# Altium PCB F103C8T6.PcbDoc
Units mil, origin at the board's own origin, x right, y up, seen from the top; angles counter-clockwise.
Board outline 2300 x 1000 mil, 2 copper layers (Top Layer, Bottom Layer); 40 components, 49 nets, 177 pads, 68 vias.
Unrouted connection lines stored in the file: 127.
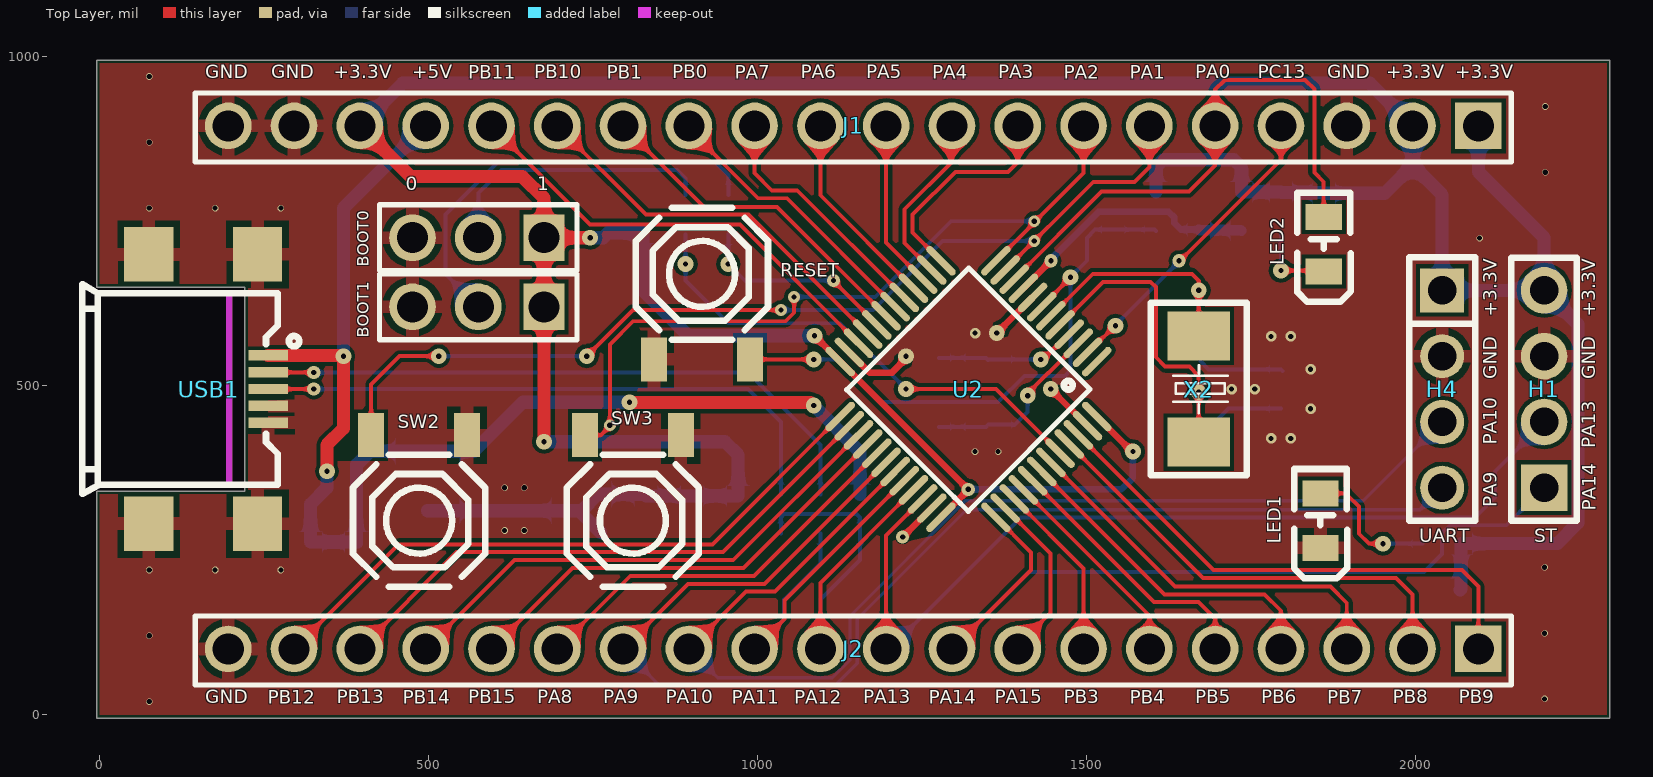
[diagram p0: Top Layer view]
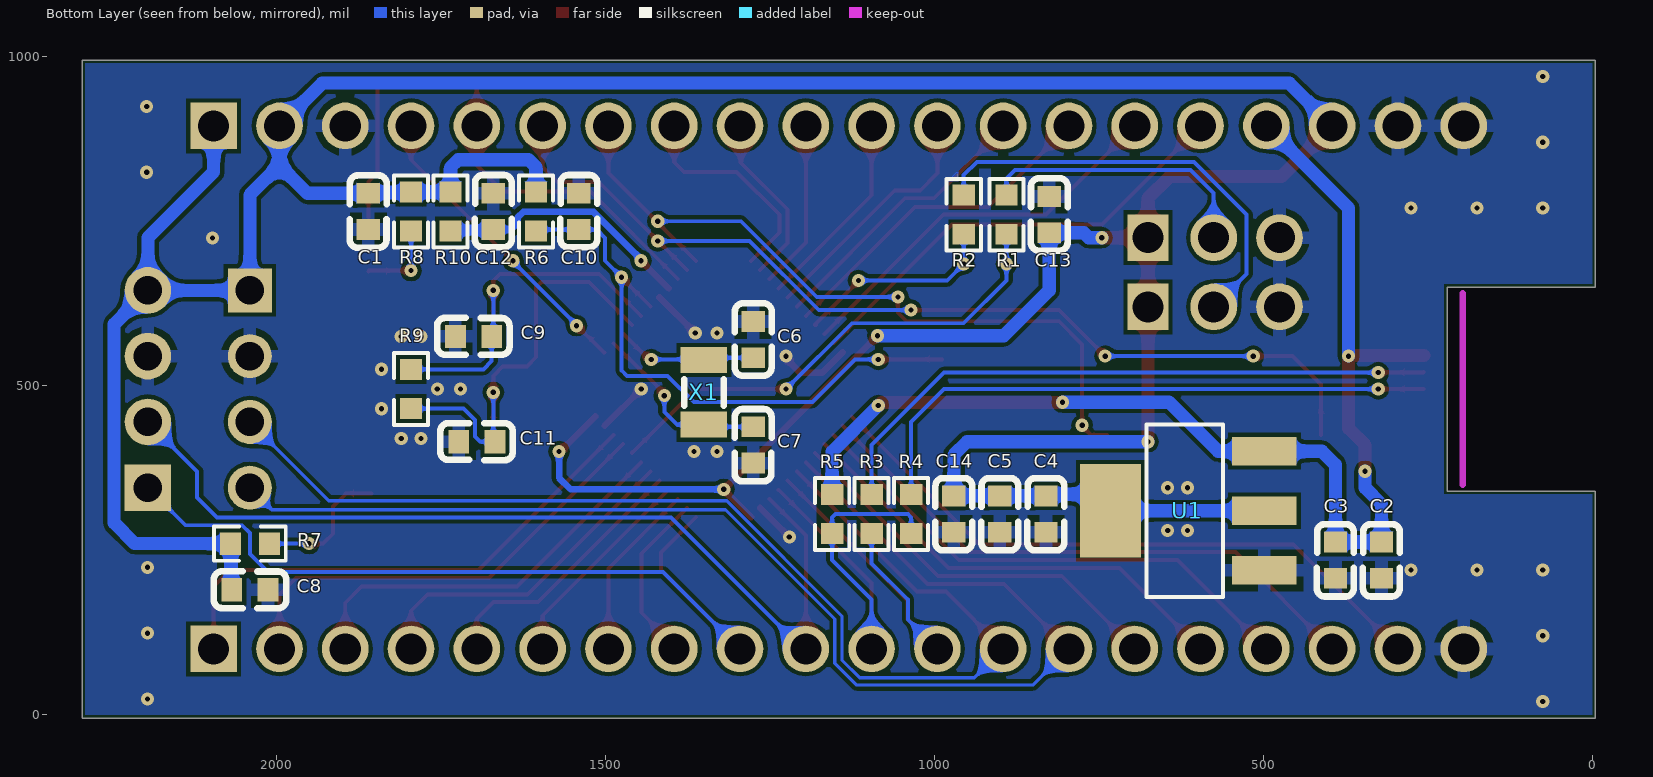
[diagram p1: Bottom Layer view, seen from below]

## Layer stack, top to bottom
Top Solder: solder mask 0.4, Solder Resist, Dk 3.5
Top Layer: signal copper 1.4
Dielectric 1: dielectric 12.6, FR-4, Dk 4.8
Bottom Layer: signal copper 1.4
Bottom Solder: solder mask 0.4, Solder Resist, Dk 3.5

## Board outline
-5,-5 -5,340 220,340 220,650 -5,650 -5,995 2295,995 2295,-5

## Design rules (kind name [scope] priority, off if disabled: settings)
Clearance [All] p1: gap=6 ignorepadtopadclearanceinfootprint=FALSE except(5: Arc-Via Track-Via SMDPad-Via THPad-Via Via-Via)
DiffPairsRouting [All] p1: maxlimit=10 minlimit=6 mostfreqgap=10 toplayer_minwidth=6 toplayer_maxwidth=15 toplayer_prefwidth=6 bottomlayer_minwidth=6 bottomlayer_maxwidth=15 bottomlayer_prefwidth=6 maxuncoupledlength=500
PlaneClearance [All] p1: clearance=8
PolygonConnect [All] p1: thpad.connectstyle=Relief thpad.reliefconductorwidth=20 thpad.reliefentries=4 thpad.polygonreliefangle="90 Angle" thpad.airgapwidth=10 smdpad.connectstyle=Relief smdpad.reliefconductorwidth=20 smdpad.reliefentries=4 smdpad.polygonreliefangle="90 Angle" smdpad.airgapwidth=10 via.connectstyle=Direct via.reliefconductorwidth=20 via.reliefentries=4 via.polygonreliefangle="90 Angle" via.airgapwidth=10
RoutingVias [All] p1: holewidth=8 width=50 viastyle="Through Hole" minholewidth=8 minwidth=24 maxholewidth=28 maxwidth=24
SilkToSilkClearance [All] p1: silktosilkclearance=2
SolderMaskExpansion [All] p1: expansion=4 istentingtop=FALSE
Width [All] p1: maxlimit=40 minlimit=5 preferedwidth=6 minimp=50.000000 maximp=50.000000 favimp=50.000000
27 further rules are at their usual default settings.

## Classes and differential pairs
component class F103C8T6: BOOT0 C1 C2 C3 C4 C5 C6 C7 C8 C9 C10 C11 C12 C13 H1 H4 J1 J2 LED1 LED2 R1 R2 R3 R4 R5 R6 R7 R8 R9 R10 RESET SW2 SW3 U1 X1 X2
differential pair NewDifferentialPair1: +NetR4_1 -NetR3_1

## Components (designator, comment, footprint, x,y, rotation, side; value= is the part's Value field where it differs from the comment)
BOOT0 "2.54-1*3P针" HDR-TH_3P-P2.54-V-M-1 575,725 r180 top (schematic designator H2)
BOOT1 "2.54-1*3P针" HDR-TH_3P-P2.54-V-M-1 575,620 r180 top (schematic designator H3)
C1 "CAP_100nf" C0603 1860,765 r90 bottom value=100nF
C2 "CAP_10uf" C0603 320,235 r90 bottom value=10uF
C3 "CAP_100nf" C0603 390,235 r90 bottom value=100nF
C4 "CAP_100nf" C0603 830,305 r90 bottom value=100nF
C5 "CAP_10uf" C0603 900,305 r90 bottom value=10uF
C6 "CAP_12pf_0603" C0603 1275,570 r270 bottom value=12pF
C7 "CAP_12pf_0603" C0603 1275,410 r90 bottom value=12pF
C8 "CAP_100nf" C0603 2040,190 r0 bottom value=100nF
C9 "CAP_20pf_0603" C0603 1700,575 r180 bottom value=20pF
C10 "CAP_100nf" C0603 1540,765 r270 bottom value=100nF
C11 "CAP_20pf_0603" C0603 1695,415 r180 bottom value=20pF
C12 "CAP_100nf" C0603 1670,765 r270 bottom value=100nF
C13 "CAP_100nf" C0603 825,760 r270 bottom value=100nF
C14 "CAP_100nf" C0603 970,305 r90 bottom value=100nF
H1 "2.54-1*4P反弯排针" HDR-TH_4P-P2.54-H-M-W10.4 2195,495 r90 top
H4 "PZ254V-11-04P" HDR-TH_4P-P2.54-V-M 2040,495 r270 top
J1 "2.54-1*20P直针" HDR-TH_20P-P2.54-V-M-1 1145,895 r180 top
J2 "2.54-1*20P直针" HDR-TH_20P-P2.54-V-M-1 1145,100 r180 top
LED1 "NCD0805G1" LED0805-Greed 1855,295 r90 top
LED2 "NCD0805R1" LED0805-Red 1860,715 r90 top
R1 "RES_10k_0603" R0603 890,760 r270 bottom value=10kΩ
R2 "RES_10k_0603" R0603 955,760 r270 bottom value=10kΩ
R3 "RES_20Ω_0603" R0603 1095,305 r270 bottom value=20Ω
R4 "RES_20Ω_0603" R0603 1035,305 r270 bottom value=20Ω
R5 "RES_4.7K_0603" R0603 1155,305 r270 bottom value=4.7kΩ
R6 "RES_10k_0603" R0603 1605,765 r90 bottom value=10kΩ
R7 "RES_1K_0603" R0603 2040,260 r0 bottom value=1kΩ
R8 "RES_1K_0603" R0603 1795,765 r90 bottom value=1kΩ
R9 "RES_1M_0603" R0603 1795,495 r90 bottom value=1MΩ
R10 "RES_0Ω_0603" R0603 1735,765 r270 bottom value=0Ω
RESET "TS-1187A-B-A-B" SW-SMD_4P-L5.1-W5.1-P3.70-LS6.5-TL-2 915,670 r270 top (schematic designator SW1)
SW2 "TS-1187A-B-A-B" SW-SMD_4P-L5.1-W5.1-P3.70-LS6.5-TL-2 485,295 r90 top
SW3 "TS-1187A-B-A-B" SW-SMD_4P-L5.1-W5.1-P3.70-LS6.5-TL-2 810,295 r90 top
U1 "AMS1117-3.3_C6186" SOT-223-3_L6.5-W3.4-P2.30-LS7.0-BR 615,310 r180 bottom
U2 "STM32F103C8T6" LQFP-48_L7.0-W7.0-P0.50-LS9.0-BL 1320,495 r135 top
USB1 "920-F52A2021S10101" MICRO-USB-SMD_5P_C40957 165,495 r270 top
X1 "Q13FC1350000400" FC-135R_L3.2-W1.5 1350,490 r90 bottom value=32.768kHz
X2 "X50328MSB2GI" CRYSTAL-SMD_L5.0-W3.2 1670,495 r90 top value=8MHz

## Footprints (in the part's own frame and the unit in brackets; to place one, negate y for a bottom-side part, rotate by r counter-clockwise, add the part's x,y. Pads: shape width x height; smd on the part's side, far side on the other; paste and mask are expansions set on the pad)
C0603 [mm]
  rect 0.8x0.9 smd mask+0.051: 1(-0.7,0) 2(0.7,0)
  silkscreen extent -1.41,-0.71 1.39,0.72
CRYSTAL-SMD_L5.0-W3.2 [mil]
  rect 74.8x94.5 smd mask+2: 1(-80.7,0) 2(80.7,0)
  silkscreen extent -131,-73 131,73
FC-135R_L3.2-W1.5 [mil]
  rect 39.4x70.9 smd mask+2: 1(-49.2,0) 2(49.2,0)
  silkscreen extent -20,-30 20,30
HDR-TH_3P-P2.54-V-M-1 [mil]
  rect 62x70.9 hole 47.2 mask+2: 1(-100,0)
  round 70.9 hole 47.2 mask+2: 2(0,0) 3(100,0)
  silkscreen extent -150,-50 150,50
HDR-TH_4P-P2.54-H-M-W10.4 [mm]
  rect 1.8x1.8 hole 1.1 mask+0.051: 1(-3.81,0)
  round 1.8 hole 1.1 mask+0.051: 2(-1.27,0) 3(1.27,0) 4(3.81,0)
  silkscreen extent -5.09,-1.26 5.07,1.27
HDR-TH_4P-P2.54-V-M [mm]
  rect 1.7x1.7 hole 1.1 mask+0.051: 1(-3.81,0)
  round 1.7 hole 1.1 mask+0.051: 2(-1.27,0) 3(1.27,0) 4(3.81,0)
  silkscreen extent -5.08,-1.27 5.08,1.27
HDR-TH_20P-P2.54-V-M-1 [mil]
  rect 70.9x70.9 hole 47.2 mask+2: 1(-950,0)
  round 70.9 hole 47.2 mask+2: 2(-850,0) 3(-750,0) 4(-650,0) 5(-550,0) 6(-450,0) 7(-350,0) 8(-250,0) 9(-150,0) 10(-50,0) 11(50,0) 12(150,0) 13(250,0) 14(350,0) 15(450,0) 16(550,0) 17(650,0) 18(750,0) 19(850,0) 20(950,0)
  silkscreen extent -1000,-50 1000,55
LED0805-Greed [mm]
  rect 1x1.4 smd mask+0.051: 1(1.05,0) 2(-1.05,0)
  silkscreen extent -2.22,-1.04 1.99,1.01
LED0805-Red [mm]
  rect 1x1.4 smd mask+0.051: 1(1.05,0) 2(-1.05,0)
  silkscreen extent -2.22,-1.04 1.99,1.01
LQFP-48_L7.0-W7.0-P0.50-LS9.0-BL [mm]
  oval 0.27x1.5 smd mask+0.05: 1(-2.75,-4.25) 2(-2.25,-4.25) 3(-1.75,-4.25) 4(-1.25,-4.25) 5(-0.75,-4.25) 6(-0.25,-4.25) 7(0.25,-4.25) 8(0.75,-4.25) 9(1.25,-4.25) 10(1.75,-4.25) 11(2.25,-4.25) 12(2.75,-4.25) 25(2.75,4.25) 26(2.25,4.25) 27(1.75,4.25) 28(1.25,4.25) 29(0.75,4.25) 30(0.25,4.25) 31(-0.25,4.25) 32(-0.75,4.25) 33(-1.25,4.25) 34(-1.75,4.25) 35(-2.25,4.25) 36(-2.75,4.25)
  oval 1.5x0.27 smd mask+0.05: 13(4.25,-2.75) 14(4.25,-2.25) 15(4.25,-1.75) 16(4.25,-1.25) 17(4.25,-0.75) 18(4.25,-0.25) 19(4.25,0.25) 20(4.25,0.75) 21(4.25,1.25) 22(4.25,1.75) 23(4.25,2.25) 24(4.25,2.75) 37(-4.25,2.75) 38(-4.25,2.25) 39(-4.25,1.75) 40(-4.25,1.25) 41(-4.25,0.75) 42(-4.25,0.25) 43(-4.25,-0.25) 44(-4.25,-0.75) 45(-4.25,-1.25) 46(-4.25,-1.75) 47(-4.25,-2.25) 48(-4.25,-2.75)
  silkscreen extent -3.33,-3.31 3.3,3.34
MICRO-USB-SMD_5P_C40957 [mil]
  rect 15.7x60 smd mask+2: 1(-51.2,90.8) 2(-25.6,90.8) 3(0,90.8) 4(25.6,90.8) 5(51.2,90.8)
  rect 82.7x74.8 smd mask+2: 6(204.7,74.6) 7(204.7,-90.8) 8(-204.7,-90.8) 9(-204.7,74.6)
  Keep-Out Layer lines w10: 145.7,31.3 -145.7,31.3 145.7,31.3
  silkscreen extent -159,-192 159,138
R0603 [mil]
  rect 31.75x34.02 smd mask+2: 1(-29.66,0) 2(29.66,0)
  silkscreen extent -55,-26 55,26
SOT-223-3_L6.5-W3.4-P2.30-LS7.0-BR [mm]
  rect 2.5x1.1 smd mask+0.051: 1(2.97,-2.3) 2(2.97,0) 3(2.97,2.3)
  rect 2.34x3.6 smd mask+0.051: 4(-2.97,0)
  silkscreen extent -1.57,-3.33 1.37,3.33
SW-SMD_4P-L5.1-W5.1-P3.70-LS6.5-TL-2 [mm]
  rect 1.7x1 smd mask+0.051: 2(3.3,1.85) 4(3.3,-1.85)
  silkscreen extent -2.55,-2.55 2.55,2.55

## Part data
BOOT0 BOOT1: Color=黑色, Current Rating (Max)=3A, JLCPCB Part Class="Extended Part", LCSC Part Name="2.54mm 1x3P 直插 方针", Manufacturer=BOOMELE(博穆精密), Operating Temperature Range=-40℃~+105℃, Voltage Rating (Max)=-, Add into BOM=yes, Circluar Pins/Square Pins=方针, Contact Material=-, Contact Plating=-, Convert to PCB=yes, Datasheet=https://atta.szlcsc.com/upload/public/pdf/source/20221018/3E9408392E35E6F57A28985E5F7BF5C9.pdf, Device=2.54-1*3P针, Insulation Height=-, Length of End Connection Pin=-, Length of Mating Pin=-, Manufacturer Part=2.54-1*3P针, Mounting Type=直插, Name=2.54-1*3P针, Number of Pins=3, Number of Rows=单排, Pin Structure=1x3P, Pitch=2.54mm, Row Spacing=-, Supplier=LCSC, Supplier Footprint=插件,P=2.54mm, Supplier Part=C49257, Symbol=Header-Male-2.54_1x3
C1 C3 C4 C8 C10 C12 C13 C14: JLCPCB Part Class="Basic Part", LCSC Part Name="100nF ±10% 50V", Manufacturer=YAGEO(国巨), Manufacturer Part=CC0603KRX7R9BB104, Temperature Coefficient=X7R, Tolerance=±10%, Voltage Rated=50V, Add into BOM=yes, Convert to PCB=yes, Datasheet=https://atta.szlcsc.com/upload/public/pdf/source/20170116/1484561234239.pdf, Device=CC0603KRX7R9BB104, Name=100nF, Supplier=LCSC, Supplier Footprint=0603, Supplier Part=C14663, Symbol=CC0603KRX7R9BB104
C2 C5: JLCPCB Part Class="Basic Part", LCSC Part Name="10uF ±20% 25V", Manufacturer=SAMSUNG(三星), Manufacturer Part=CL10A106MA8NRNC, Temperature Coefficient=X5R, Tolerance=±20%, Voltage Rated=25V, Add into BOM=yes, Convert to PCB=yes, Datasheet=https://atta.szlcsc.com/upload/public/pdf/source/20170325/1490427913016.pdf, Device=CL10A106MA8NRNC, Name=10uF, Supplier=LCSC, Supplier Footprint=0603, Supplier Part=C96446, Symbol=CL10A106MA8NRNC
C6 C7: JLCPCB Part Class="Basic Part", LCSC Part Name="12pF ±5% 50V", Manufacturer=SAMSUNG(三星), Manufacturer Part=CL10C120JB8NNNC, Temperature Coefficient=C0G, Tolerance=±5%, Voltage Rated=50V, Add into BOM=yes, Convert to PCB=yes, Datasheet=https://atta.szlcsc.com/upload/public/pdf/source/20160103/1457707725436.pdf, Device=CL10C120JB8NNNC, Name=12pF, Supplier=LCSC, Supplier Footprint=0603, Supplier Part=C38523, Symbol=CL10C120JB8NNNC
C9 C11: JLCPCB Part Class="Basic Part", LCSC Part Name="20pF ±5% 50V", Manufacturer=SAMSUNG(三星), Manufacturer Part=CL10C200JB8NNNC, Temperature Coefficient=C0G, Tolerance=±5%, Voltage Rated=50V, Add into BOM=yes, Convert to PCB=yes, Datasheet=https://atta.szlcsc.com/upload/public/pdf/source/20160103/1457707686863.pdf, Device=CL10C200JB8NNNC, Name=20pF, Supplier=LCSC, Supplier Footprint=0603, Supplier Part=C1648, Symbol=CL10C200JB8NNNC
H1: Color=黑色, Current Rating (Max)=3A, JLCPCB Part Class="Extended Part", LCSC Part Name="2.54mm 1x4P 弯插 方针 托盘", Manufacturer=BOOMELE(博穆精密), Operating Temperature Range=-55℃~+105℃, Voltage Rating (Max)=-, Add into BOM=yes, Circluar Pins/Square Pins=方针, Contact Material=-, Contact Plating=-, Convert to PCB=yes, Datasheet=https://atta.szlcsc.com/upload/public/pdf/source/20190508/C74252_03DDEC4696EE17172E44B96636392962.pdf, Device=2.54-1*4P反弯排针, Insulation Height=-, Length of End Connection Pin=-, Length of Mating Pin=6mm, Manufacturer Part=2.54-1*4P反弯排针, Mounting Type=弯插, Name=2.54-1*4P反弯排针, Number of Pins=4, Number of Rows=单排, Pin Structure=1x4P, Pitch=2.54mm, Row Spacing=-, Supplier=LCSC, Supplier Footprint=弯插,P=2.54mm, Supplier Part=C91552, Symbol=2.54-1*4P反弯排针
H4: library part 2.54-1*4P直针, Color=黑色, Current Rating (Max)=3A, JLCPCB Part Class="Extended Part", LCSC Part Name="2.54mm 1x4P 直插 方针", Manufacturer=XFCN(兴飞), Operating Temperature Range=-40℃~+105℃, Voltage Rating (Max)=250V, Add into BOM=yes, Circluar Pins/Square Pins=方针, Contact Material=-, Convert to PCB=yes, Datasheet=https://atta.szlcsc.com/upload/public/pdf/source/20200309/C492403_F9F19131791D08044AD4F84F8E751A34.pdf, Device=PZ254V-11-04P, Insulation Height=2.5mm, Length of End Connection Pin=3mm, Length of Mating Pin=6mm, Manufacturer Part=PZ254V-11-04P, Mounting Type=直插, Name=PZ254V-11-04P, Number of Pins=4, Number of Rows=单排, Pin Structure=1x4P, Pitch=2.54mm, Row Spacing=-, Supplier=LCSC, Supplier Footprint=直插,P=2.54mm, Supplier Part=C2691448, Symbol=PZ254V-11-04P_C2691448
J1 J2: Color=黑色, Current Rating (Max)=3A, JLCPCB Part Class="Extended Part", LCSC Part Name="2.54mm 1x20P 直插 方针", Manufacturer=BOOMELE(博穆精密), Operating Temperature Range=-40℃~+105℃, Voltage Rating (Max)=-, Add into BOM=yes, Circluar Pins/Square Pins=方针, Contact Material=黄铜, Contact Plating=-, Convert to PCB=yes, Datasheet=https://atta.szlcsc.com/upload/public/pdf/source/20151109/1457707571495.pdf, Device=2.54-1*20P直针, Insulation Height=-, Length of End Connection Pin=-, Length of Mating Pin=-, Manufacturer Part=2.54-1*20P直针, Mounting Type=直插, Name=2.54-1*20P直针, Number of Pins=20, Number of Rows=单排, Pin Structure=1x20P, Pitch=2.54mm, Row Spacing=-, Supplier=LCSC, Supplier Footprint=插件,P=2.54mm, Supplier Part=C50981, Symbol=Header-Male-2.54_1x20
LED1: library part LED_Greed_0805, Emitted Color=翠绿, JLCPCB Part Class="Extended Part", Manufacturer=国星光电, Add into BOM=yes, Convert to PCB=yes, Datasheet=https://atta.szlcsc.com/upload/public/pdf/source/20200820/C84260_AFC7BF57C6FBA034D182BB8D10A67EFE.pdf, Device=NCD0805G1, LCSC Part Name=翠绿, Manufacturer Part=NCD0805G1, Name=NCD0805G1, Supplier=LCSC, Supplier Footprint=0805, Supplier Part=C84260, Symbol=FC-2012UGK-520D5
LED2: library part LED_Red_0805, Emitted Color=红灯, JLCPCB Part Class="Basic Part", Manufacturer=国星光电, Add into BOM=yes, Convert to PCB=yes, Datasheet=https://atta.szlcsc.com/upload/public/pdf/source/20200820/C84256_F0A75A43B3EAD75808600A0514C76B99.pdf, Device=NCD0805R1, LCSC Part Name=红灯, Manufacturer Part=NCD0805R1, Name=NCD0805R1, Supplier=LCSC, Supplier Footprint=0805, Supplier Part=C84256, Symbol=FC-2012HRK-620D
R1 R2 R6 R9: JLCPCB Part Class="Basic Part", LCSC Part Name="10kΩ ±1% 100mW", Manufacturer=UNI-ROYAL(厚声), Manufacturer Part=0603WAF1002T5E, Operating Temperature Range=-55℃~+155℃, Overload Voltage (Max)=75V, Power(Watts)=100mW, Temperature Coefficient=±100ppm/℃, Tolerance=±1%, Add into BOM=yes, Convert to PCB=yes, Datasheet=https://atta.szlcsc.com/upload/public/pdf/source/20200306/C422600_1E6D84923E4A46A82E41ADD87F860B5C.pdf, Device=0603WAF1002T5E, Supplier=LCSC, Supplier Footprint=0603, Supplier Part=C25804, Symbol=0603WAF1002T5E, Type=厚膜电阻
  R1 R2 R6: Name=10kΩ
  R9: Name=1MΩ
R3 R4: JLCPCB Part Class="Basic Part", LCSC Part Name="20Ω ±1%", Manufacturer=UNI-ROYAL(厚声), Manufacturer Part=0603WAF200JT5E, Operating Temperature Range=-55℃~+155℃, Overload Voltage (Max)=75V, Power(Watts)=1/10W, Temperature Coefficient=±100ppm/℃, Tolerance=±1%, Add into BOM=yes, Convert to PCB=yes, Datasheet=https://atta.szlcsc.com/upload/public/pdf/source/20170920/C22950_1505900999591982337.pdf, Device=0603WAF200JT5E, Name=20Ω, Supplier=LCSC, Supplier Footprint=0603, Supplier Part=C22950, Symbol=0603WAF200JT5E
R5 R7 R8: JLCPCB Part Class="Basic Part", LCSC Part Name="1kΩ ±1% 100mW", Manufacturer=UNI-ROYAL(厚声), Manufacturer Part=0603WAF1001T5E, Operating Temperature Range=-55℃~+155℃, Overload Voltage (Max)=75V, Power(Watts)=100mW, Temperature Coefficient=±100ppm/℃, Tolerance=±1%, Add into BOM=yes, Convert to PCB=yes, Datasheet=https://atta.szlcsc.com/upload/public/pdf/source/20200306/C422600_1E6D84923E4A46A82E41ADD87F860B5C.pdf, Device=0603WAF1001T5E, Supplier=LCSC, Supplier Footprint=0603, Supplier Part=C21190, Symbol=0603WAF1001T5E, Type=厚膜电阻
  R5: Name=4.7kΩ
  R7 R8: Name=1kΩ
R10: JLCPCB Part Class="Basic Part", LCSC Part Name="0Ω ±1% 100mW", Manufacturer=UNI-ROYAL(厚声), Manufacturer Part=0603WAF0000T5E, Operating Temperature Range=-55℃~+155℃, Overload Voltage (Max)=75V, Power(Watts)=100mW, Tolerance=±1%, Add into BOM=yes, Convert to PCB=yes, Datasheet=https://atta.szlcsc.com/upload/public/pdf/source/20200306/C422600_1E6D84923E4A46A82E41ADD87F860B5C.pdf, Device=0603WAF0000T5E, Name=0Ω, Supplier=LCSC, Supplier Footprint=0603, Supplier Part=C21189, Symbol=0603WAF0000T5E, Type=厚膜电阻
RESET SW2 SW3: library part SW, Actuator/Cap Color=金色, Contact Current=50mA, Insulation Resistance=-, JLCPCB Part Class="Basic Part", LCSC Part Name="5.1*5.1*1.5 防水金属头160gf", Manufacturer="XKB Connectivity(中国星坤)", Operating Force=160gf, Operating Temperature=-30℃~+85℃, Voltage Rating (DC)=12V, Actuator Style=圆形按钮, Add into BOM=yes, Circuit=单刀单掷, Convert to PCB=yes, Datasheet=https://atta.szlcsc.com/upload/public/pdf/source/20200227/C318884_1F20165719E1C4CAA3E10C4C359C6E26.pdf, Device=TS-1187A-B-A-B, Manufacturer Part=TS-1187A-B-A-B, Mechanical Life=100000, Mounting Style=立贴, Name=TS-1187A-B-A-B, Strike Gundam=否, Supplier=LCSC, Supplier Footprint=SMD, Supplier Part=C318884, Switch Height=1.5mm, Switch Length=5.1mm, Switch Width=5.1mm, Symbol=TS-1187A-B-A-B, With Lamp=无
U1: Dropout Voltage=1.3V@(800mA), JLCPCB Part Class="Basic Part", LCSC Part Name="正 Vout=3.3V 1A 72dB@(120Hz)", Manufacturer=AMS, Manufacturer Part=AMS1117-3.3, Maximum Input Voltage=-, Output Current=1A, Output Voltage=3.3V, Power Supply Rejection Ratio (PSRR)=72dB@(120Hz), Add into BOM=yes, Convert to PCB=yes, Datasheet=https://atta.szlcsc.com/upload/public/pdf/source/20180727/C6186_7A095716F0823C02F1997A905E26C086.pdf, Device=AMS1117-3.3_C6186, Feature=-, Name=AMS1117-3.3, Noise=-, Number of Outputs=1, Operating Temperature=-, Output Polarity=正, Output Type=固定, Quiescent Current (Ground Current)=-, Supplier=LCSC, Supplier Footprint=SOT-223-3, Supplier Part=C6186, Symbol=AMS1117-3.3
U2: JLCPCB Part Class="Basic Part", LCSC Part Name="ARM Cortex-M3 72MHz 闪存：64K@x8bit RAM：20KB MSL=3", Manufacturer=ST(意法半导体), Maximum Frequency=72MHz, Operating Temperature Range=-40℃~+85℃, Supply Voltage Range=2V~3.6V, ADC (Units/Channels/bits)=1@x10ch/12bit, Add into BOM=yes, Convert to PCB=yes, CPU Core="ARM Cortex-M3", Datasheet=https://atta.szlcsc.com/upload/public/pdf/source/20140724/1457707174202.pdf, Device=STM32F103C8T6, EEPROM/Data FLASH Size=-, GPIO Ports Number=37, Internal Oscillator=有, Manufacturer Part=STM32F103C8T6, Name=STM32F103C8T6, Peripherals / Functions / Protocol Stacks=看门狗；DMA；看门狗；片载温度传感器, Program FLASH Size=64K@x8bit, RAM Size=20KB, Supplier=LCSC, Supplier Footprint=LQFP-48(7x7), Supplier Part=C8734, Symbol=STM32F103C8T6
USB1: library part Micro-B, JLCPCB Part Class="Extended Part", Manufacturer=精拓金, Add into BOM=yes, Connector Type=Micro-B, Convert to PCB=yes, Datasheet=https://atta.szlcsc.com/upload/public/pdf/source/20210308/C40957_FC68CD1637FCE8729A4C46B59B3229A9.pdf, Device=920-F52A2021S10101, Gender=母座, LCSC Part Name=920-F52A2021S10101, Manufacturer Part=920-F52A2021S10101, Name=920-F52A2021S10101, Number of Contacts=5, Number of Ports=1, Standard="USB 2", Supplier=LCSC, Supplier Footprint=-, Supplier Part=C40957, Symbol="micro 5PBroken plate1.274 Pins"
X1: library part 32.768KHZ, Equivalent Series Resistance (ESR)=70kΩ, Frequency Tolerance=±20ppm, JLCPCB Part Class="Basic Part", LCSC Part Name="32.768kHz ±20ppm 12.5pF", Load Capacitance=12.5pF, Manufacturer=EPSON(爱普生), Operating Temperature=-40℃~+85℃, Add into BOM=yes, Convert to PCB=yes, Crystal Type=贴片无源晶振, Datasheet=https://atta.szlcsc.com/upload/public/pdf/source/20190108/C32346_746D6B07EAF90824457A96480007685F.pdf, Device=Q13FC1350000400, Manufacturer Part=Q13FC1350000400, Name=32.768kHz, Supplier=LCSC, Supplier Footprint=SMD3215-2P, Supplier Part=C32346, Symbol=Q13FC1350000400
X2: library part 8MHZ, Frequency Stability=±50ppm, Frequency Tolerance=±10ppm, JLCPCB Part Class="Basic Part", LCSC Part Name="YSX530GA 8MHz ±10ppm 20pF", Load Capacitance=20pF, Manufacturer=YXC(扬兴晶振), Operating Temperature=-40℃~+85℃, Add into BOM=yes, Convert to PCB=yes, Crystal Type=贴片无源晶振, Datasheet=https://atta.szlcsc.com/upload/public/pdf/source/20210329/C112559_847D3CACBA33ACCEB57DEA3AEBB187A1.pdf, Device=X50328MSB2GI, Manufacturer Part=X50328MSB2GI, Name=8MHz, Supplier=LCSC, Supplier Footprint=SMD5032-2P, Supplier Part=C115962, Symbol=X50328MSB2GI

## Via types
v1: diameter 24/20 (per signal layer), hole 8, Top Layer to Bottom Layer, tented both sides, 25 vias
v2: diameter 10/20 (per signal layer), hole 8, Top Layer to Bottom Layer, tented both sides, 16 vias
v3: diameter 16/20 (per signal layer), hole 8, Top Layer to Bottom Layer, tented both sides, 8 vias
v4: diameter 20/20 (per signal layer), hole 8, Top Layer to Bottom Layer, tented both sides, 7 vias
v5: diameter 10/20 (per signal layer), hole 8, Top Layer to Bottom Layer, 6 vias
v6: diameter 18/20 (per signal layer), hole 8, Top Layer to Bottom Layer, tented both sides, 5 vias
v7: diameter 16/20 (per signal layer), hole 8, Top Layer to Bottom Layer, 1 vias

## Nets (pads, with @x,y where several pads share a name; then routed paths per layer and width w, separated by ;. In a path a pad name is that pad's centre, name@x,y a point inside that pad or via, vN(x,y) a via of type N, cw(c..) or ccw(c..) an arc to the next point about the centre after c; other vN are vias at no path point)
+3.3V: BOOT0.1 BOOT1.1 C1.2 C4.2 C5.2 C8.2 C13.2 C14.2 H1.4 H4.1 J1.1 J1.2 J1.18 R6.2 R7.2 R8.2 R10.1 U1.2 U1.4 U2.24 U2.36 U2.48 | length 6382.7
  Top Layer w10: v1(1085.94,575.94) U2.24 1319.32,342.56 1319.32,341.37 1278.25,300.3 U2.36 ; U2.48 1515.04,453.25 1567.52,400.77 v1@1569.23,400.77
  Top Layer w16: v1@1569.23,400.77 v1(1570,400)
  Top Layer w20: J1.18 472.14,817.86 642.14,817.86 675,785 BOOT0.1 ; v1(675,415) BOOT1.1 BOOT0.1 ; v1(745,725) BOOT0.1
  Bottom Layer w10: v4(1319.63,342.56) 1552.56,342.56 1570,360 v1(1570,400)
  Bottom Layer w20: J1.18 460,960 1930,960 J1.2 1995,835 ; U1.2 728.07,310 U1.4@760.63,277.44 ; v1(675,415) 950,415 970,395 C14.2 C5.2 C4.2 827.56,335 756.93,335 U1.4 ; BOOT0.1 BOOT0.1@675,729.45 ; v1(745,725) 765,725 772.44,732.44 C13.2 825,645 894.06,575.94 v1(1085.94,575.94) ; R6.2 1605,832.24 1616.31,843.55 1723.28,843.55 1735,831.83 R10.1 R8.2 1796.05,793.61 1858.95,793.61 C1.2 1952.56,792.56 1995,835 ; C8.2 2068.61,191.05 2068.61,258.95 R7.2 2215,260 2246.43,291.43 2246.43,593.57 H1.4 ; J1.1 2095,825 2195,725 H1.4 ; 1995,835 2040,790 H4.1 H1.4
+5V: C2.2 C3.2 J1.17 R5.1 U1.3 USB1.1 | length 1911.9
  Top Layer w20: USB1.1 368.8,546.2 v1(370,545) 370,435 345,410 v1(345,370) ; v1(805,475) 805.62,474.38 1079.53,474.38 1083.92,470 v1(1085,470)
  Bottom Layer w15: C3.2 C3.2@392.56,260 ; R5.1 R5.1@1155.34,335
  Bottom Layer w20: v1(345,370) 345,345 320,320 C2.2 C3.2 390,380 410.55,400.55 U1.3 568.28,400.55 642.73,475 v1(805,475) ; v1(370,545) 370,770 J1.17 ; v1(1085,470) 1155,400 R5.1
BOOT0: R1.2 U2.44 | length 749.1
  Top Layer w6: v1(1225,495) 1361.76,495 U2.44 U2.44@1459.19,398.82
  Bottom Layer w6: R1.2@890,730 v1(890,685) 890,660 955,595 1125,595 v1(1225,495)
BOOT1: R2.2 U2.20 | length 311.8
  Top Layer w6: v4(1115,660) 1115,659.12 1180.81,593.31 U2.20 U2.20@1179.55,592.43
  Bottom Layer w6: R2.2 v1(955,685) 980,660 v4(1115,660)
GND: BOOT0.3 BOOT1.3 C1.1 C2.1 C3.1 C4.1 C5.1 C6.1 C7.1 C8.1 C9.1 C10.1 C11.1 C12.1 C13.1 C14.1 H1.3 H4.2 J1.3 J1.19 J1.20 J2.20 LED1.2 RESET.4 SW2.4 SW3.4 U1.1 U2.8 U2.23 U2.35 U2.47 USB1.4 USB1.5 USB1.6 USB1.7 USB1.8 USB1.9 | length 329.8
  Top Layer w6: U2.47@1500.81,439.32 U2.47
  Top Layer w10: U2.23 1169.73,520 1203.79,520 1225,541.21 v1(1225,545) ; v4(1220,270) 1220.14,270 1264.19,314.05 U2.35 U2.35@1264.32,314.19 ; v1(1362.99,580.05) 1363.14,580.05 1417.28,634.19 U2.8 ; v1(1445,495) 1472.57,467.43 1472.67,467.43 U2.47@1500.78,439.32
  other v2: 75,20 2195.66,23.98 75,120 2195.66,123.98 75,220 175,220 275,220 2195.66,223.98 2096.88,724.47 75,770 175,770 275,770 2196.88,824.47 75,870 2196.88,924.47 75,970
  other v3: 1780,420 1810,420 1840,465 1720,495 1755,495 1840,525 1780,575 1810,575
  other v5: 615,280 645,280 615,345 645,345 1330,400 1365,400
  other v7: 1330,580
NetC12_2: C12.2 R10.2 U2.9 | length 397.8
  Top Layer w10: U2.9 v4(1445.41,690)
  Bottom Layer w10: v4(1445.41,690) 1445.41,691.87 1517.73,764.19 1624.59,764.19 1633.01,755.77 1633.01,746.99 1642.56,737.44 C12.2
  Bottom Layer w16: C12.2 1671.05,736.39 1733.95,736.39 R10.2
NetH2_2: BOOT0.2 R1.1 | length 428.2
  Bottom Layer w6: BOOT0.2 575,793.03 609.97,828 877,828 890,815 R1.1
NetH3_2: BOOT1.2 R2.1 | length 662.5
  Bottom Layer w6: BOOT1.2 525,670 525,760 605,840 935,840 955,820 R2.1
NetLED1_1: LED1.1 R7.1 | length 212.1
  Top Layer w6: LED1.1 1895,336.35 1895,335 1913.44,316.56 1913.44,275.07 1928.51,260 v1(1950,260)
  Bottom Layer w6: v1(1950,260) R7.1
NetLED2_2: LED2.2 R8.1 | length 125.9
  Top Layer w6: v1(1795,675) 1858.65,675 LED2.2
  Bottom Layer w6: v1(1795,675) R8.1
NetR3_1: R3.1 USB1.2 | length 960.4
  Top Layer w6: USB1.2 256.1,520.3 324.7,520.3 v4(325,520)
  Bottom Layer w6: v4(325,520) 985,520 1095,410 R3.1
NetR4_1: R4.1 USB1.3 | length 910.3
  Top Layer w6: USB1.3 v4(325,495)
  Bottom Layer w6: v4(325,495) 985,495 1035,445 R4.1
NRST: C10.2 R6.1 RESET.2 U2.7 | length 919.8
  Top Layer w6: RESET.2 987.92,540 v1(1085,540) ; U2.7 1431.36,620.81 1475,664.46 v1(1475,665)
  Bottom Layer w6: v1(1085,540) 1120,540 1185,475 1365,475 1405,515 1466.49,515 1475,523.51 v1(1475,665) 1500,690 1500,724.79 1512.65,737.44 1602.9,737.44 R6.1
OSC32-IN: C7.2 U2.3 X1.1 | length 281.2
  Top Layer w6: v1(1410,485) 1410,488.28 1440.96,519.24 1441.68,519.24 U2.3
  Bottom Layer w6: C7.2 1346.76,437.56 1350.14,440.94 1390.94,440.94 1410,460 v1(1410,485)
OSC32-OUT: C6.2 U2.4 X1.2 | length 215.7
  Top Layer w6: v1(1430,540) 1433.34,540 1471.86,578.52 U2.4
  Bottom Layer w6: C6.2 1346.76,542.44 X1.2 1350.8,540 v1(1430,540)
OSC-IN: C11.2 R9.1 U2.5 X2.1 | length 699.5
  Top Layer w6: U2.5 1524.76,658 1597,658 1605,650 1605,543.32 1619.02,529.3 1655.7,529.3 1670,515 v1(1670,490) X2.1
  Bottom Layer w6: v1(1670,490) 1670,417.56 C11.2 1670,415 1690,415 1697.81,422.81 1697.81,447.81 1715.34,465.34 R9.1
OSC-OUT: C9.2 R9.2 U2.6 X2.2 | length 578.9
  Top Layer w6: U2.6 1508.92,670 1660,670 1670,660 v1(1670,645) X2.2
  Bottom Layer w6: v1(1670,645) 1670,577.44 C9.2 1672.44,537.56 1685,525 1794.66,525 R9.2 R9.2@1797.1,522.56
PA0: J1.5 LED2.1 U2.10 | length 855.2
  Top Layer w6: U2.10 1522.56,795 1655,795 1695,835 J1.5 1695,950 1710,965 1831.49,965 1845.74,950.74 1845.74,824.26 1860,810 LED2.1
PA1: J1.6 SW2.2 U2.11 | length 1522
  Top Layer w6: SW2.2 412.16,502.16 455,545 v1(515,545) ; v1(740,545) 810,615 v6(1035,615) ; U2.11 1509.73,810 1572.5,810 1595,832.5 J1.6
  Bottom Layer w6: v1(515,545) v1(740,545) ; v6(1035,615) 1175.34,615 1280.34,720 v6(1420,720)
PA2: J1.7 SW3.2 U2.12 | length 1164.9
  Top Layer w6: SW3.2 761.49,424.92 775,438.43 v6(775,440) 775,563 810,598 1042.04,598 1055,610.96 v6(1055,635) ; U2.12 1495,823.12 J1.7
  Bottom Layer w6: v6(1055,635) 1178.37,635 1293.37,750 v6(1420,750)
PA3: J1.8 U2.13 | length 336.2
  Top Layer w6: U2.13 1235,733.12 1235,760 1300,825 1380,825 1395,840 J1.8
PA4: J1.9 U2.14 | length 266
  Top Layer w6: U2.14 1223,717.27 1223,768.28 1293.56,838.84 1293.56,893.56 J1.9
PA5: J1.10 U2.15 | length 255.9
  Top Layer w6: J1.10 1195,717.44 U2.15
PA6: J1.11 U2.16 | length 305.5
  Top Layer w6: J1.11 1095,789.59 U2.16
PA7: J1.12 U2.17 | length 377.7
  Top Layer w6: J1.12 995,823.05 1021.05,797 1059.76,797 U2.17
PA8: J2.15 U2.29 | length 609.1
  Top Layer w6: J2.15 806,211 994.24,211 U2.29
PA9: H4.4 J2.14 U2.30 | length 1958.6
  Top Layer w6: J2.14@805,100 J2.14 894,199 1010.08,199 U2.30
  Bottom Layer w5: J2.14 849.95,45.05 1117.76,45.05 1151.05,78.34 1151.05,145.49 1317.06,311.5 2006.5,311.5 H4.4
PA10: H4.3 J2.13 U2.31 | length 1789
  Top Layer w6: J2.13 982,187 1025.92,187 U2.31
  Bottom Layer w5: J2.13 938.95,56.05 1113.2,56.05 1140,82.85 1140,150 1315,325 1920,325 H4.3
PA11: J2.12 R3.2 U2.32 | length 566.8
  Top Layer w6: J2.12 1040.44,145.44 1040.44,173.68 U2.32
  Bottom Layer w6: J2.12 1040,145 1040,175 1095,230 R3.2
PA12: J2.11 R4.2 R5.2 U2.33 | length 674.1
  Top Layer w6: J2.11 1095,200.41 U2.33
  Bottom Layer w6: R4.2 1035,300 1040,305 1150,305 1155,300 R5.2 1155,235 1095,175 J2.11
PA13: H1.2 J2.10 U2.34 | length 1417.3
  Top Layer w6: J2.10 1195,272.56 U2.34
  Bottom Layer w6: J2.10 1200,100 1400,300 2090,300 2120,330 2120,370 H1.2
PA14: H1.1 J2.9 U2.37 | length 1292.1
  Top Layer w6: J2.9 1415,220 1415,246.88 U2.37
  Bottom Layer w6: J2.9 1411.72,216.72 2012.67,216.72 2040,244.05 2040,275.95 2052.05,288 2138,288 H1.1
PA15: J2.8 U2.38 | length 264.6
  Top Layer w6: U2.38 1445,244.73 1445,155 1393.68,103.68 1393.68,101.32 J2.8
PB0: J1.13 U2.18 | length 430.4
  Top Layer w6: J1.13 895,890 1000,785 1043.92,785 U2.18
PB1: J1.14 U2.19 | length 519.3
  Top Layer w6: J1.14 918,772 1029.08,772 U2.19
PB3: J2.7 U2.39 | length 271.6
  Top Layer w6: U2.39 1495,222.56 J2.7
PB4: J2.6 U2.40 | length 321.2
  Top Layer w6: U2.40 1595,150.41 J2.6
PB5: J2.5 U2.41 | length 410.5
  Top Layer w6: U2.41 1602.24,171 1670,171 1695,146 J2.5
PB6: J2.4 U2.42 | length 509.3
  Top Layer w6: U2.42 1618.08,183 1770,183 1795,158 J2.4
PB7: J2.3 U2.43 | length 608.2
  Top Layer w6: U2.43 1633.92,195 1870,195 1895,170 J2.3
PB8: J2.2 U2.45 | length 699.5
  Top Layer w6: U2.45 1676.63,207.97 1970,207.97 1995,182.97 J2.2
PB9: J2.1 U2.46 | length 798.4
  Top Layer w6: U2.46 1692.47,219.97 2069.97,219.97 2095,194.93 J2.1
PB10: J1.15 U2.21 | length 603
  Top Layer w6: J1.15 830,760 985.41,760 U2.21
PB11: J1.16 U2.22 | length 694.8
  Top Layer w6: J1.16 745,745 972.56,745 U2.22
PB12: J2.19 U2.25 | length 976.4
  Top Layer w6: J2.19 454,259 930.88,259 U2.25
PB13: J2.18 U2.26 | length 884.6
  Top Layer w6: J2.18 542,247 946.73,247 U2.26
PB14: J2.17 U2.27 | length 792.8
  Top Layer w6: J2.17 630,235 962.56,235 U2.27
PB15: J2.16 U2.28 | length 700.9
  Top Layer w6: J2.16 718,223 978.41,223 U2.28
PC13: J1.4 U2.2 | length 468.3
  Top Layer w6: U2.2 1502.02,550.68 1542.53,591.18 v1(1543.6,591.18) ; v4(1640,690) 1641.52,690 1795,843.48 J1.4
  Bottom Layer w6: v1(1543.6,591.18) 1543.6,592.39 1640,688.79 v4(1640,690)
pads on no net: U2.1

## Polygon pours and split planes (outlines as drawn)
GND on Top Layer "GND_L01_P002" (solid, pour order 2): 0,990 0,655 225,655 225,335 0,335 0,0 2290,0 2290,990
no net on Top Layer "NONET_L01_P000" (solid, pour order 0): 0,990
GND on Bottom Layer "GND_L02_P003" (solid, pour order 3): 0,990 0,655 225,655 225,335 0,335 0,0 2290,0 2290,990
no net on Bottom Layer "NONET_L02_P004" (solid, pour order 4): 963.48,823.51 966.03,823.51 978.01,811.54 963.23,811.54

## Other copper
Top Layer:
  pour cut-out: 386.47,385.46 386.46,385.47 360.43,385.47 360.43,415.43 375,430 375.32,429.68 386.45,429.68
  pour cut-out: 255.8,459.4
  pour cut-out: 295.8,459.4 293.65,461.55 295.8,459.4
  pour cut-out: 255.8,479.4 295.8,479.4 255.8,477.23
  pour cut-out: 1234.27,265.11 1240.63,271.47 1261.12,271.47
  pour cut-out: 1234.36,265.29 1240.54,271.47 1261.12,271.47 1261.12,273.28 1247.55,286.85 1237.32,276.62 1234.65,276.62
Bottom Layer:
  pour cut-out: 2091.65,241.75 2088.49,238.59 2084.12,238.59 2084.12,213.68 2084.27,213.53 2084.46,213.72 2089.31,213.72 2089.31,234.76 2091.54,236.99
  pour cut-out: 2031.36,211.91 2031.36,228.27 2042.71,239.62 2049.78,239.62 2056.41,232.99 2056.12,232.69 2056.12,216.04 2051.84,211.76
  pour cut-out: 931.99,830.03 931.99,811.54 945.01,811.54 945.49,812.01 945.49,816.54
  pour cut-out: 913.01,811.54 896.21,811.54 896.2,811.53 896.2,820 889.64,826.57 890.48,827.41 890.48,830.85 913.01,830.85 913.08,830.93
  pour cut-out: 866.99,811.54 867.06,811.6 867.06,819.6 877.92,819.6 878.15,819.84 878.96,819.03 878.96,811.49
  pour cut-out: 1178.01,312.78 1159.87,312.78 1159.71,312.63 1159.71,297.28 1159.7,297.26 1159.75,297.22 1178.01,297.22
  pour cut-out: 1159.71,312.63
  pour cut-out: 1011.99,312.78 1012.05,312.85 1030.88,312.85 1030.88,297.2 1030.77,297.09 1030.64,297.22 1011.99,297.22

## Silkscreen, mask and mechanical layers (free items; w line width, h text height)
Top Overlay:
  text "GND" at 160,960.39 h35
  text "GND" at 260,960.39 h35
  text "+3.3V" at 355,960.39 h35
  text "+5V" at 475,960.39 h35
  text "PB11" at 560,960 h35
  text "PB10" at 660,960.39 h35
  text "PB1" at 770,960 h35
  text "PB0" at 870,960.39 h35
  text "PA7" at 965,960 h35
  text "PA6" at 1065,960.39 h35
  text "PA5" at 1165,960.39 h35
  text "PA4" at 1265,960 h35
  text "PA3" at 1365,960.39 h35
  text "PA2" at 1465,960 h35
  text "PA1" at 1565,960 h35
  text "PA0" at 1665,960.39 h35
  text "PC13" at 1760,960.39 h35
  text "GND" at 1865,960.39 h35
  text "+3.3V" at 1955,960.39 h35
  text "+3.3V" at 2060,960.39 h35
  text "0" at 465,790.39 h35
  text "1" at 665,790 h35
  text "+3.3V" at 2129.61,605 h35 r90
  text "+3.3V" at 2279.61,605 h35 r90
  text "GND" at 2129.61,510 h35 r90
  text "GND" at 2279.61,510 h35 r90
  text "PA10" at 2129.61,410 h35 r90
  text "PA13" at 2279.61,405 h35 r90
  text "PA9" at 2129.61,315 h35 r90
  text "PA14" at 2280,310 h35 r90
  text "UART" at 2005,255.39 h35
  text "ST" at 2180,255.39 h35
  text "GND" at 160,10.39 h35
  text "PB12" at 255,10 h35
  text "PB13" at 360,10.39 h35
  text "PB14" at 460,10 h35
  text "PB15" at 560,10.39 h35
  text "PA8" at 665,10.39 h35
  text "PA9" at 765,10.39 h35
  text "PA10" at 860,10.39 h35
  text "PA11" at 960,10 h35
  text "PA12" at 1055,10 h35
  text "PA13" at 1160,10.39 h35
  text "PA14" at 1260,10 h35
  text "PA15" at 1360,10.39 h35
  text "PB3" at 1465,10.39 h35
  text "PB4" at 1565,10 h35
  text "PB5" at 1665,10.39 h35
  text "PB6" at 1765,10.39 h35
  text "PB7" at 1865,10 h35
  text "PB8" at 1965,10.39 h35
  text "PB9" at 2065,10.39 h35
Mechanical 1:
  the board outline again, w10